# EAGLE board Opto_v1 (EAGLE 8.6.3)
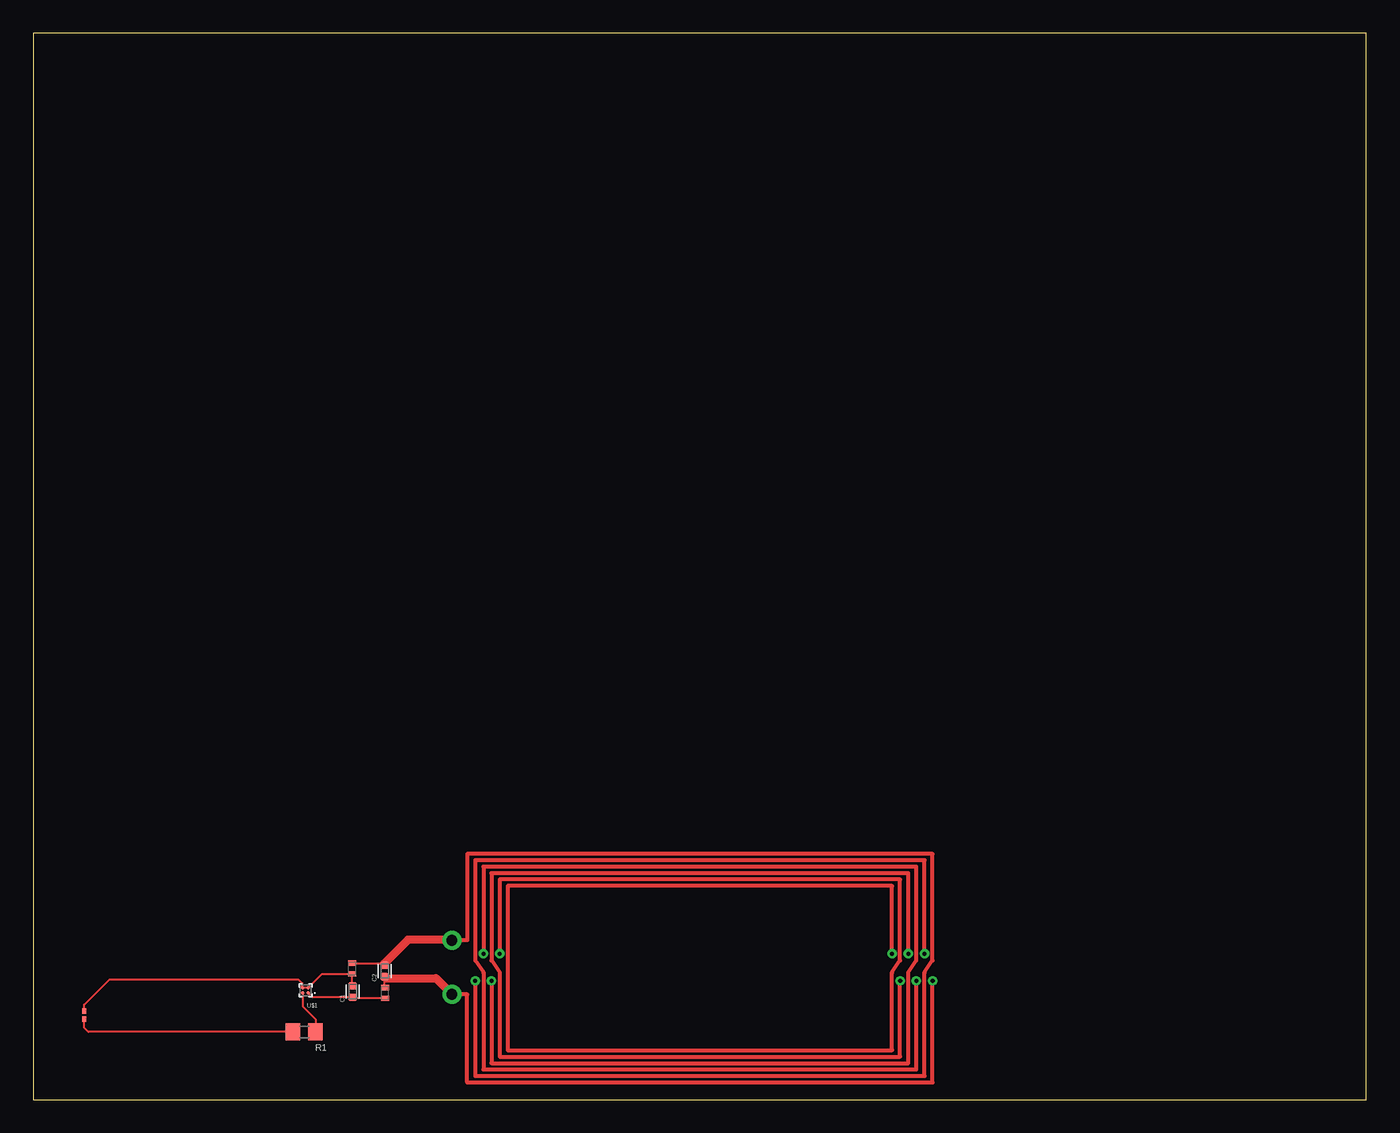
[diagram p0: board, top side]
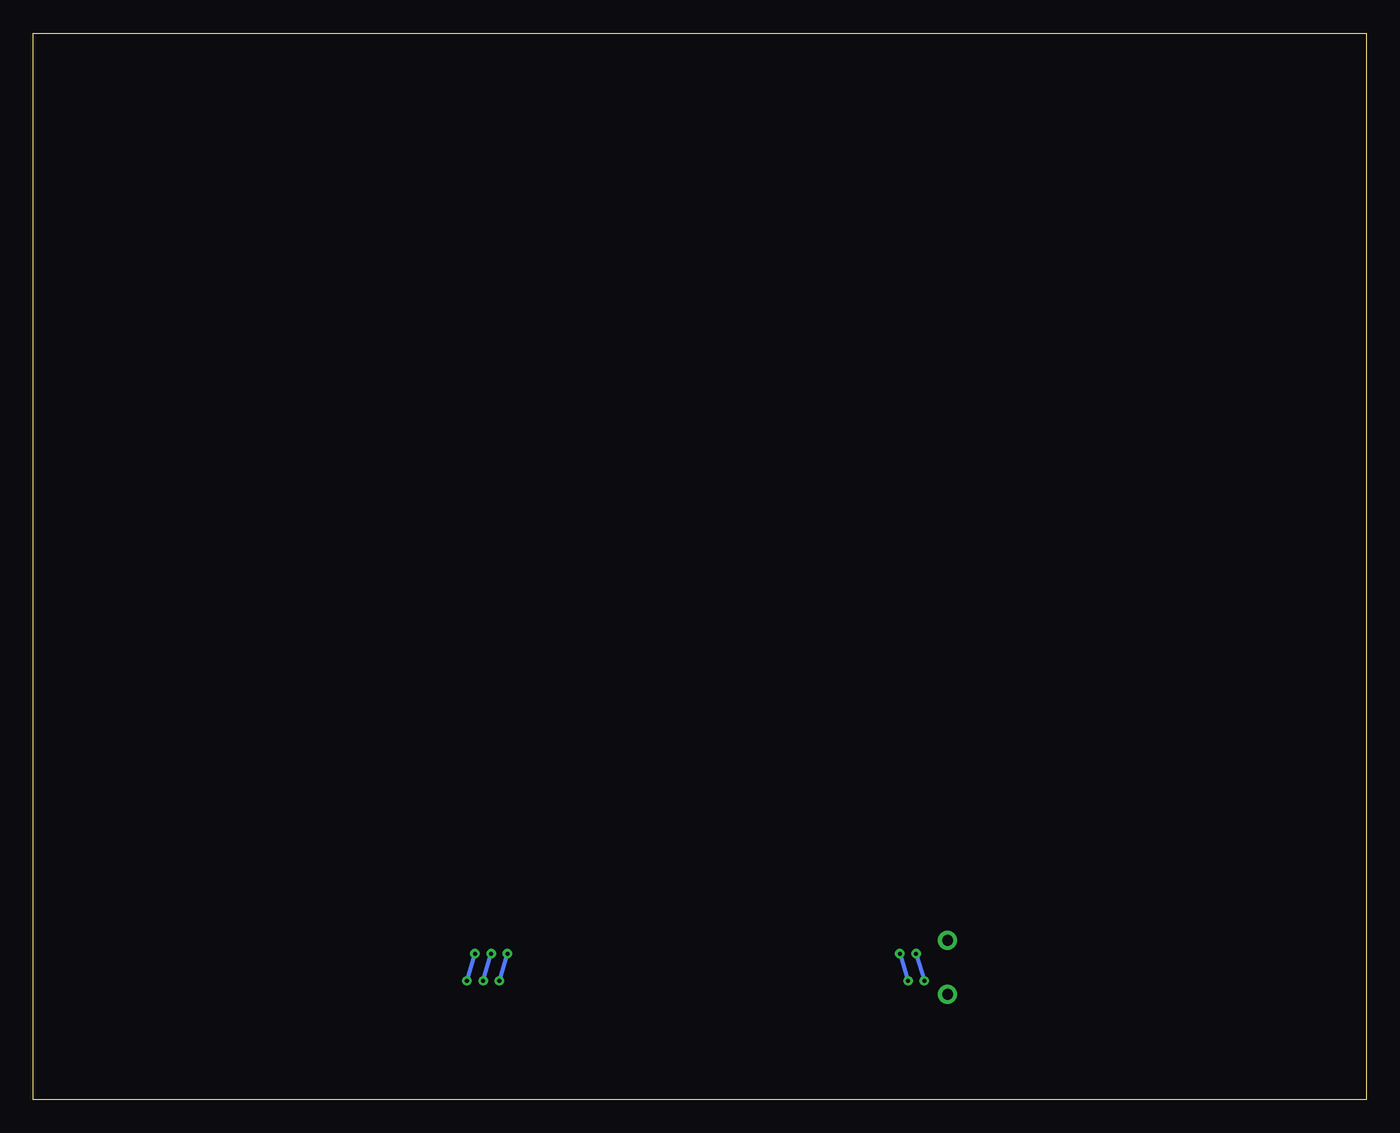
[diagram p1: board, bottom side, seen from below]

Size 100 x 80 mm. Coordinates in mm from the lower left corner, seen from the top.
Outline: 0,0 100,0 100,80 0,80 0,0
Copper layers (1*16): Top 0.035mm / dielectric 1.5mm / Bottom 0.035mm
Design rules "default": minimum track width 6mil, minimum drill 0.35mm, track to track 6mil, track to pad 6mil, pad to pad 6mil, via to via 6mil, smd to smd 6mil, copper to edge 40mil, drill to drill 6mil, minimum pad ring 10mil, minimum via ring 8mil, stop-mask expansion 4mil, vias tented up to drill 0mil, thermal gap 10mil

## Footprints (pad centres in the part's own frame; a part is rotated, then mirrored left to right if it is on the bottom)
CAPC1005X55N = smd 0.54 x 0.6: 1 -0.43,0; 2 0.43,0
RESC1608X55 = smd 1.1 x 1.25: 1 -0.85,0; 2 0.85,0
BGA4C40P2X2_84X84X60N = smd 0.25 x 0.25: A1 -0.2,0.2; A2 0.2,0.2; B1 -0.2,-0.2; B2 0.2,-0.2
0402_MURATA = smd 0.4 x 0.6: P$1 -0.4,0; P$2 0.4,0
CREE-TR2227 = smd 0.4 x 0.3: P$1 -0.3,0; P$2 0.3,0

## Placement (x,y rotation side)
C1  AMK105BJ225MV-F  [CAPC1005X55N]  23.96,8.1 90 top
C2  AMK105BJ225MV-F  [CAPC1005X55N]  26.36,9.65 90 top
R1  CRCW06033K30FKEA  [RESC1608X55]  20.32,5.08 180 top
U$1  BGA4C4  [BGA4C40P2X2_84X84X60N]  20.42,8.19 180 top
U$2  SCHOTTKY0402  [0402_MURATA]  26.38,8 270 top
U$3  SCHOTTKY0402  [0402_MURATA]  23.92,9.83 90 top
U$4  CREE-TR2227  [CREE-TR2227]  3.81,6.35 90 top

## Library data of the parts
C1 C2 = AMK105BJ225MV-F; AVAILABILITY: Unavailable; DESCRIPTION: Cap Ceramic 2.2uF 4V X5R 20% SMD 0402 85°C T/R; MF: Taiyo Yuden; MP: AMK105BJ225MV-F; PACKAGE: 0402 Taiyo Yuden; PRICE: None
R1 = CRCW06033K30FKEA; DESCRIPTION: Res Thick Film 0603 3.3K Ohm 1% 0.1W_1/10W_ ?100ppm/C SMD Automotive Paper T/R; DIGI-KEY_PART_NUMBER: 541-3.30KHCT-ND; DIGI-KEY_PURCHASE_URL: https://www.digikey.com/product-detail/en/vishay-dale/CRCW06033K30FKEA/541-3.30KHCT-ND/1179866?utm_source=snapeda&utm_medium=aggregator&utm_campaign=symbol; MF: Vishay Dale; MP: CRCW06033K30FKEA; PACKAGE: 0603 Vishay
U$1 = LOD_BGA4C40P2X2_84X84X60N
U$2 U$3 = Schottki_0402
U$4 = CREE-TR2227

## Nets
GND: C1.2 U$1.B1 U$1.B2 U$3.P$1 U$4.P$2
IN+: C2.1 U$2.P$1
IN-: C2.2 U$3.P$2
N$1: R1.1 U$1.A2
N$2: R1.2 U$4.P$1
N$4: C1.1 U$1.A1 U$2.P$2

## Tracks (layer width: path | path; a pad name or v marks a point on that pad's centre or on a via)
ANT  (via drill 0.3, 0.81 pad 1.42)
  Top 0.305: v33.77,10.94 33.77,17.47 66.25,17.47 66.25,10.43 65.64,9.54 65.64,2.73 34.38,2.73 v34.38,8.91 | v34.99,10.94 34.99,16.5 65.04,16.5 65.04,10.43 64.43,9.54 64.43,3.7 35.6,3.7 35.6,16.02 64.43,16.02 v64.43,10.94 | v33.16,8.91 33.16,1.77 66.86,1.77 66.86,9.54 67.47,10.43 67.47,18.43 32.55,18.43 32.55,11.95 v31.41,11.95 | v31.41,7.89 32.55,7.89 32.55,1.29 67.47,1.29 v67.47,8.91 | v66.86,10.94 66.86,17.95 33.16,17.95 33.16,10.43 33.77,9.54 33.77,2.25 66.25,2.25 v66.25,8.91 | v65.64,10.94 65.64,16.98 34.38,16.98 34.38,10.43 34.99,9.54 34.99,3.22 65.04,3.22 v65.04,8.91
  Bottom 0.305: v33.77,10.94 v33.16,8.91 | v34.99,10.94 v34.38,8.91 | v65.04,8.91 v64.43,10.94 | v66.25,8.91 v65.64,10.94 | v67.47,8.91 v66.86,10.94
GND
  Top 0.152: U$4.P$2 3.81,7.11 4.55,7.85 5.04,8.34 5.7,9 19.9,9 20.17,8.73 20.17,8.34 U$1.B2 U$1.B1 21.66,9.43 23.9,9.43 | 23.9,9.43 U$3.P$1 | C1.2 23.9,8.59 23.9,9.43
IN+
  Top 0.152: U$2.P$1 26.36,8.42 C2.1
IN-
  Top 0.152: U$3.P$2 26.21,10.23 C2.2
N$1
  Top 0.152: U$1.A2 20.22,6.98 21.17,6.03 R1.1
N$2
  Top 0.152: U$4.P$1 3.81,5.39 4.12,5.08 R1.2
N$4
  Top 0.152: C1.1 23.9,7.67 | 23.9,7.67 20.94,7.67 U$1.A1 | U$2.P$2 23.97,7.6 23.9,7.67
S$1
  Top 0.61: 31.4,12 28.1,12 26.3,10.2
S$2
  Top 0.61: 26.4,9.1 30.2,9.1 31.4,7.9

## Text on the board
tDocu: 13.56 RFID Antenna for PN53x | Not tested in production | Outside dimension 1480 x 720 mil